# Altium PCB PCB1.PcbDoc
Units mil, origin at the board's own origin, x right, y up, seen from the top; angles counter-clockwise.
Board outline 538 x 411.54 mil, 2 copper layers (Top Layer, Bottom Layer); 24 components, 16 nets, 62 pads, 27 vias.
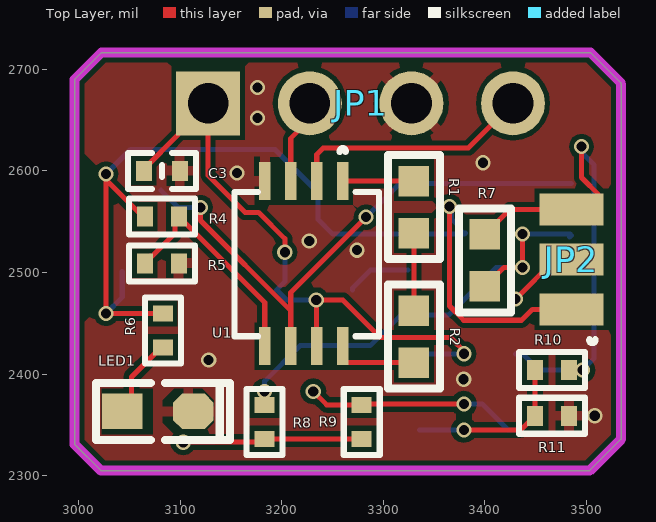
[diagram p0: Top Layer view]
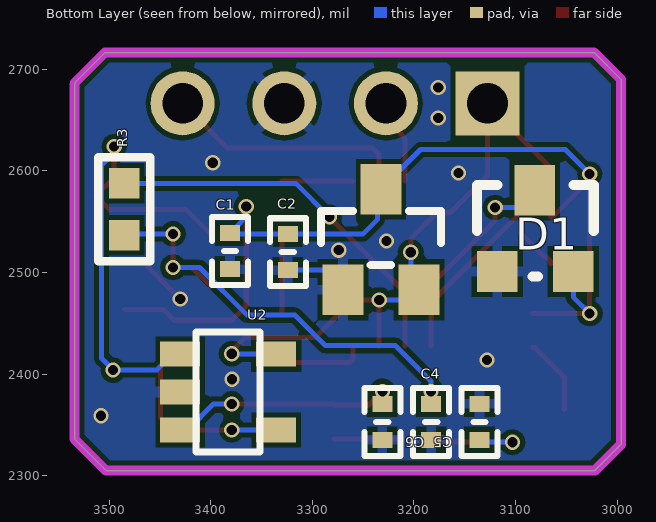
[diagram p1: Bottom Layer view, seen from below]
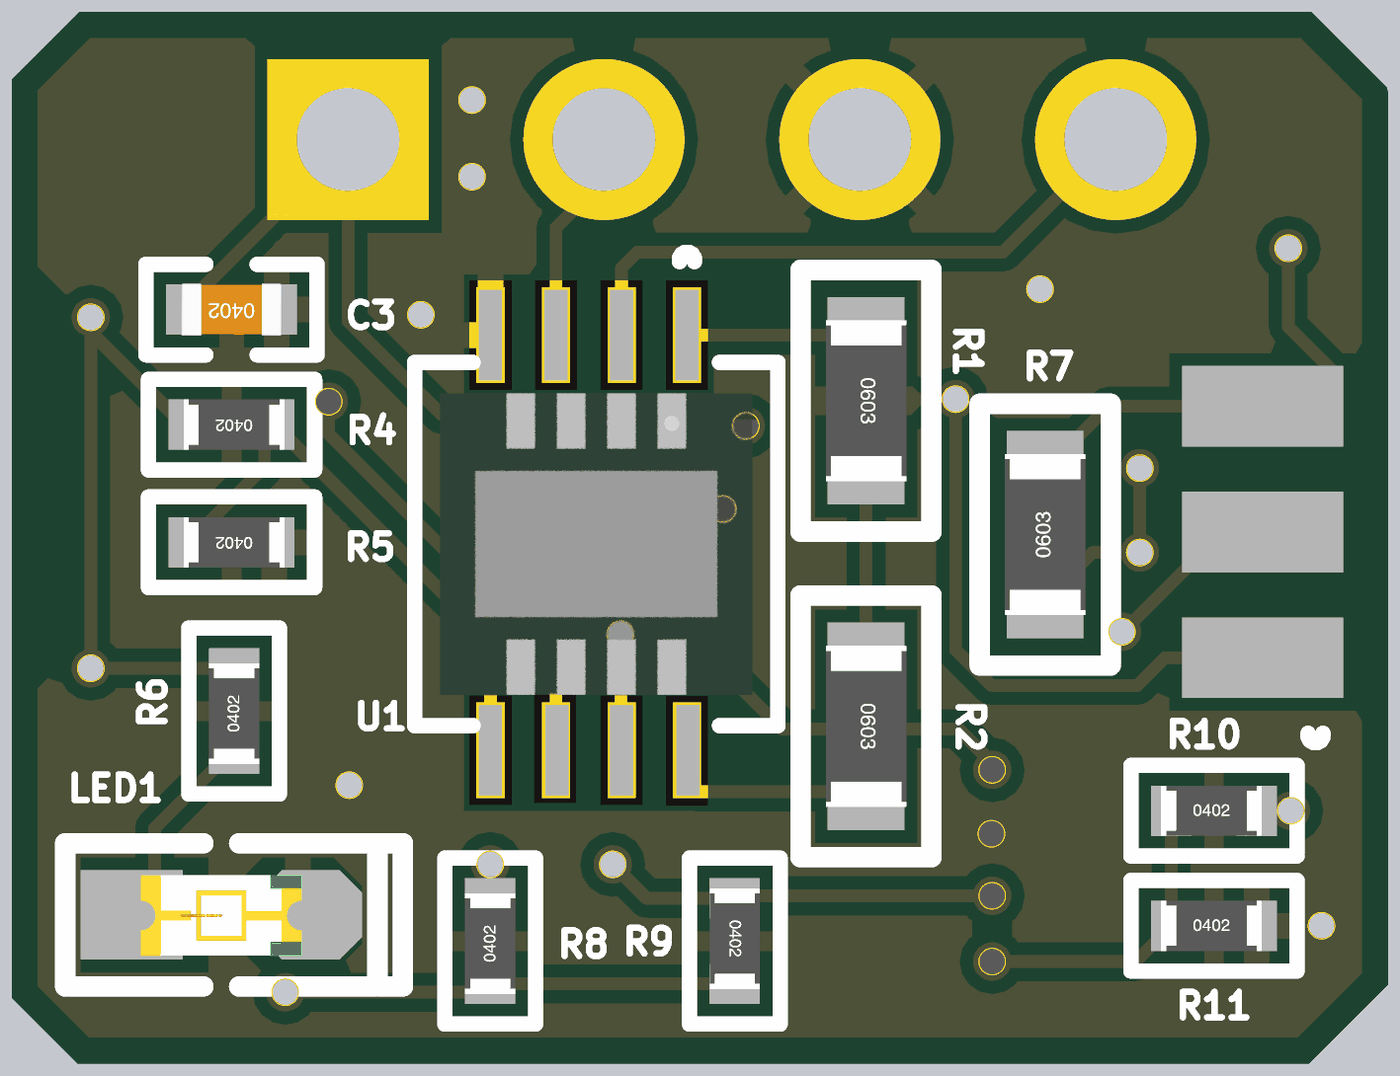
[diagram p2: 3D render of the assembled board from above, using the file's embedded part models]
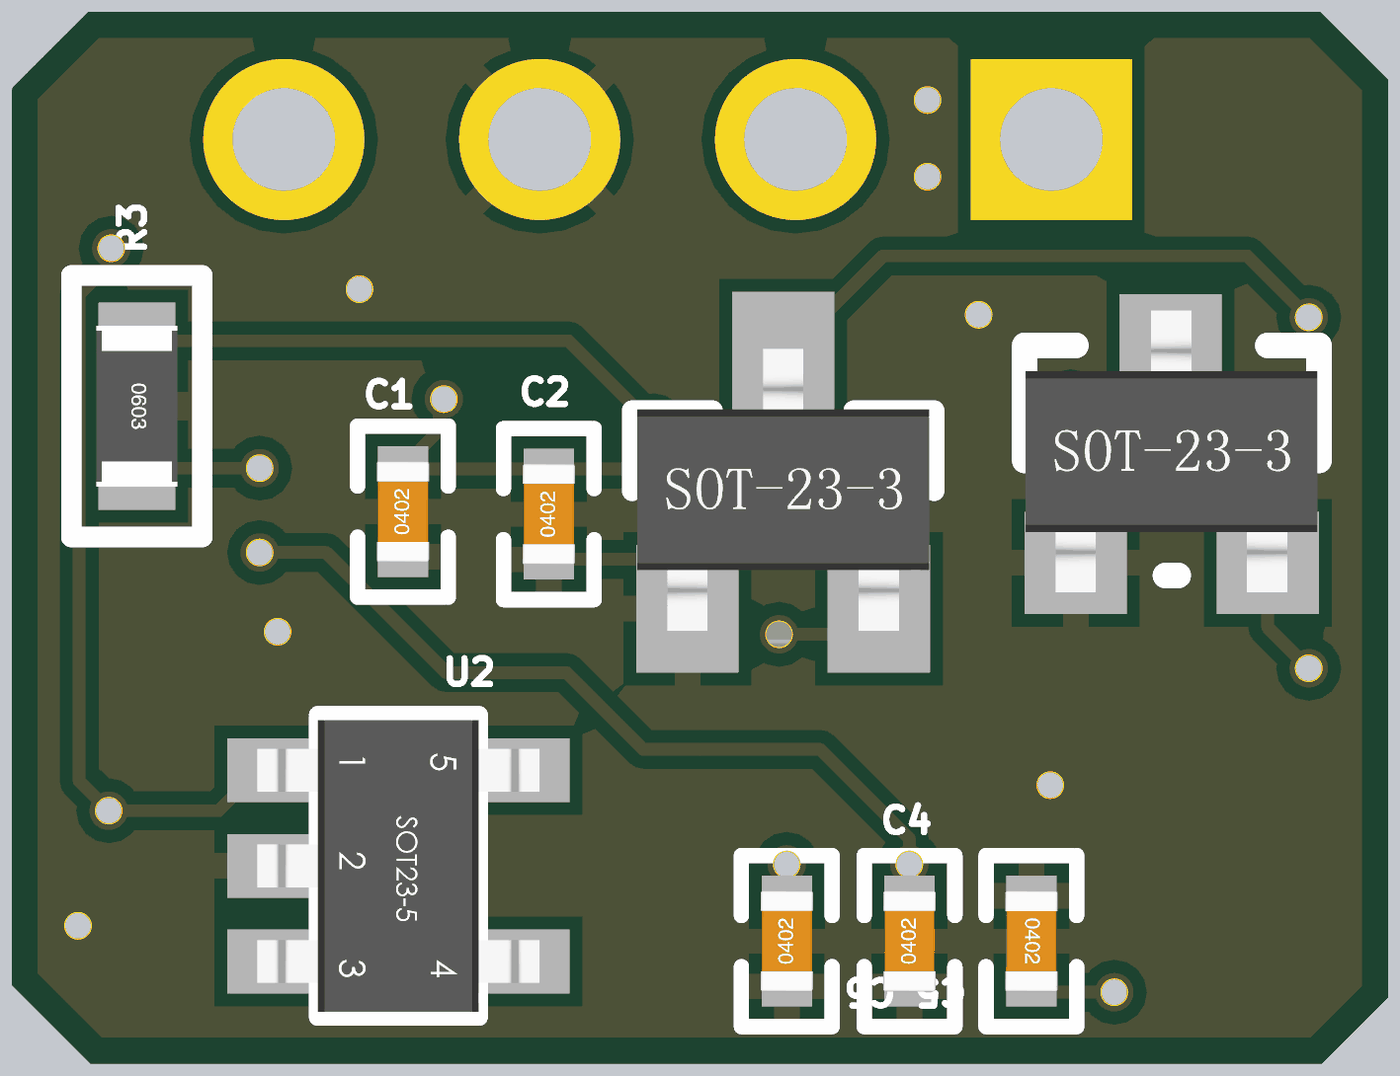
[diagram p3: 3D render of the assembled board from below, using the file's embedded part models]

## Layer stack, top to bottom
Top Solder: solder mask 0.4, Solder Resist, Dk 3.5
Top Layer: signal copper 1.4
Dielectric 1: dielectric 12.6, FR-4, Dk 4.8
Bottom Layer: signal copper 1.4
Bottom Solder: solder mask 0.4, Solder Resist, Dk 3.5

## Board outline
2996,2331 3022,2305 3503,2305 3534,2336 3534,2685 3533.46,2687.01 3503.94,2716.54 3022.54,2716.54 2996,2690

## Design rules (kind name [scope] priority, off if disabled: settings)
Clearance [All] p1: gap=5 ignorepadtopadclearanceinfootprint=FALSE
HoleToHoleClearance [All] p1: gap=5 allowstackedmicrovias=TRUE
MinimumSolderMaskSliver [All] p1: minsoldermaskwidth=3
PolygonConnect [All] p1: thpad.connectstyle=Relief thpad.reliefconductorwidth=10 thpad.reliefentries=4 thpad.polygonreliefangle="45 Angle" thpad.airgapwidth=5 smdpad.connectstyle=Relief smdpad.reliefconductorwidth=10 smdpad.reliefentries=4 smdpad.polygonreliefangle="90 Angle" smdpad.airgapwidth=5 via.connectstyle=Direct via.reliefconductorwidth=10 via.reliefentries=4 via.polygonreliefangle="45 Angle" via.airgapwidth=0
RoutingVias [All] p1: holewidth=10 width=50 viastyle="Through Hole" minholewidth=10 minwidth=5 maxholewidth=28 maxwidth=50
SilkToSilkClearance [All] p1: silktosilkclearance=5
SilkToSolderMaskClearance [IsPad] p1: minsilkscreentomaskgap=5 clearancetoexposedcopper=TRUE
SolderMaskExpansion [IsVia] p1: expansion=4 istentingtop=TRUE
Width [All] p1: maxlimit=10 minlimit=3 preferedwidth=5 minimp=50.000000 maximp=50.000000 favimp=50.000000
26 further rules are at their usual default settings.

## Components (designator, comment, footprint, x,y, rotation, side; value= is the part's Value field where it differs from the comment)
C1 "100nF" "C 0402_L" 3381,2521 r90 bottom
C2 "10nF" "C 0402_L" 3324,2520 r90 bottom
C3 "100nF" "C 0402_L" 3082,2600 r180 top
C4 "100pF" "C 0402_L" 3183,2353 r90 bottom
C5 "100nF" "C 0402_L" 3135.4,2353 r270 bottom
C6 "100nF" "C 0402_L" 3231,2353 r90 bottom
D1 "BAT54S-7-F" D-Schott-BAT54S-7-F 3122.88,2500.37 r180 bottom
JP1 "" JP-4 3277.56,2716.54 r0 top
JP2 "HDR-1X3" Lines-3P 3485.65,2513.54 r90 top
LED1 "White" "LED 0603W" 3078,2363 r0 top
R1 "4.7K" "R 0603_L" 3330,2564.33 r270 top
R2 "562R" "R 0603_L" 3330,2437 r270 top
R3 "0R" "R 0603_L" 3485,2562.21 r270 bottom
R4 "10K" "R 0402_L" 3083,2555 r180 top
R5 "10K" "R 0402_L" 3083,2509 r180 top
R6 "10K" "R 0402_L" 3083,2442 r90 top
R7 "0R" "R 0603_L" 3400,2512 r90 top
R8 "5.9K" "R 0402_L" 3183.1,2352.02 r90 top
R9 "5.9K" "R 0402_L" 3278.7,2353.98 r270 top
R10 "4.1K" "R 0402_L" 3465,2404 r0 top
R11 "10K" "R 0402_L" 3465,2359 r0 top
U1 "INA333AIDRGR" DRG8_2P4X1P45 3224.57,2508.31 r270 top
U2 "HTC8551" HTC8551 3382.76,2382.4 r270 bottom
? "SGM2021" V-Regulater-SGM2021 3232.4,2532.49 r180 bottom

## Footprints (in the part's own frame and the unit in brackets; to place one, negate y for a bottom-side part, rotate by r counter-clockwise, add the part's x,y. Pads: shape width x height; smd on the part's side, far side on the other; paste and mask are expansions set on the pad)
"C 0402_L" [mm] "无极性贴片电容         淘宝ID:黄晶宝石"
  rect 0.4x0.5 smd: 1(-0.45,0) 2(0.45,0)
  silkscreen extent -0.85,-0.45 0.85,0.45, body extent -0.5,-0.26 0.5,0.26, height 0.51
D-Schott-BAT54S-7-F [mil] "封装库来自淘宝卖家 ID：黄晶宝石"
  rect 40x40 smd: 1(4.88,0.63) 2(79.88,0.63)
  rect 40x50 smd: 3(41.88,80.63)
  silkscreen extent -15,-4 100,86, body extent -15,-11 99,99, height 47
DRG8_2P4X1P45 [mm]
  rect 0.95x0.28 smd paste-0.14: 1(-2.075,0.9) 2(-2.075,0.25) 3(-2.075,-0.4) 4(-2.075,-1.05) 5(2.05,-1.05) 6(2.05,-0.4) 7(2.05,0.25) 8(2.05,0.9)
  Top Layer region: 0,-1.2 0,-1.2 0,-1.2 0,-1.2 0,-1.2 0,-1.2 0,-1.2 0,-1.2
  Top Layer region: 0,1.2 0,1.2 0,1.2 0,1.2 0,1.2 0,1.2 0,1.2 0,1.2
  silkscreen extent -2.9,-1.8 1.8,1.8, body extent -1.5,-1.55 1.5,1.55, height 0.8
HTC8551 [mm]
  rect 0.635x1 smd: 1(-0.95,-1.2) 2(0,-1.2) 3(0.95,-1.2) 4(0.95,1.2) 5(-0.95,1.2)
  silkscreen extent -1.5,-0.8 1.5,0.8, body extent -1.45,-1.4 1.45,1.4, height 1.09
JP-4 [mm] "立式直插简牛插座，间距2.54 淘宝ID:黄晶宝石   店铺网址:https://shop463601444.taobao.com"
  rect 1.6x1.6 hole 1.02: 1(-3.81,-1.27)
  round 1.6 hole 1.02: 2(-1.27,-1.27) 3(1.27,-1.27) 4(3.81,-1.27)
"LED 0603W" [mil] "白色0603LED                                        淘宝ID:黄晶宝石"
  rect 40x35 smd: 1(-35,0.26)
  oct 40x35 smd: 2(35,0.26)
  silkscreen extent -61,-28 71,28, body extent -31,-16 32,16, height 18
Lines-3P [mm] "长：8.9mm，宽：4.2mm，高：3.4mm"
  rect 0.8x1.6 smd: 1(-1.264,0.017) 2(-0.014,0.017) 3(1.236,0.017)
  silkscreen extent -2.11,-0.58 -2.01,-0.43
"R 0402_L" [mm] "1/16W贴片电阻     淘宝ID:黄晶宝石"
  rect 0.4x0.5 smd: 1(-0.4,0) 2(0.45,0)
  silkscreen extent -0.8,-0.45 0.85,0.45, body extent -0.5,-0.25 0.5,0.25, height 0.3
"R 0603_L" [mil] "1/10W贴片电阻                 淘宝ID:黄晶宝石"
  rect 30x30 smd: 1(-25.59,0) 2(25.59,0)
  silkscreen extent -51,-26 51,26, body extent -31,-16 32,16, height 16
V-Regulater-SGM2021 [mil] "3x1.3x1mm(长宽高)    封装库来自淘宝卖家 ID：黄晶宝石"
  rect 40x50 smd: 1(-37.4,-49.49) 2(37.4,-49.49) 3(0,49.49)
  silkscreen extent -59,-25 59,28, body extent -57,-58 57,52, height 47

## Part data
C1 C2 C3 C4 C5 C6: library part C, "贴片电容", BOM名称=无极性贴片电容, 封装库来自淘宝卖家 ID：黄晶宝石=其他店铺购入均为盗版假冒封装库, 联系卖家，免费查找封装=唯一出售店铺网址https://shop463601444.taobao.com
D1: library part DIODE_SCHOTTKY_BAT54S
JP1: library part JP-4
JP2: library part "Header 3", "3P接插件，SM03B-GHS-TB", BOM名称=3P接插件, 优秀评价可免费更新封装库=联系淘宝ID：黄晶宝石，获取更新版封装库, 卖家免费技术支持，联系售后=唯一出售店铺网址https://shop463601444.taobao.com, 封装库来自淘宝卖家 ID：黄晶宝石=其他店铺购入均为假冒，请申请退款，本店现金奖励
LED1: library part LED-SMD, "贴片LED", BOM名称=贴片LED, 卖家免费查找封装，联系售后=唯一出售店铺网址https://shop463601444.taobao.com, 封装库来自淘宝卖家 ID：黄晶宝石=其他店铺购入均为假冒，请立即申请退款，本店奖励2~5元现金
R1 R2 R3 R7 R8 R9 R10 R11: library part R, "贴片电阻,20kohm,±1%,1/10W,0603,SMD", BOM名称=贴片电阻, 封装库来自淘宝卖家 ID：黄晶宝石=其他店铺购入均为盗版假冒封装库, 联系卖家，免费查找封装=唯一出售店铺网址https://shop463601444.taobao.com
R4 R5 R6: library part R, "贴片电阻", BOM名称=贴片电阻, 封装库来自淘宝卖家 ID：黄晶宝石=其他店铺购入均为盗版假冒封装库, 联系卖家，免费查找封装=唯一出售店铺网址https://shop463601444.taobao.com
U1: "Low Power, Precision Instrumentation Amplifier", Manufacturer="Texas Instruments", PACKAGE_DESIGNATOR=DRG, Copyright="Copyright (C) 2021 Accelerated Designs. All rights reserved", Datasheet_URL=http://www.ti.com/lit/gpn/INA333, FAMILY_NAME="SINGLE SUPPLY", GENERIC_PART_NUMBER=INA333, INDUSTRY_STD_PKG_TYPE=SON, Manufacturer_Part_Number=INA333AIDRGR, PIN_COUNT=8, RefDes=RefDes, Type=DEV, Vendor="Texas Instruments"

## Via types
v1: diameter 15/15 (per signal layer), hole 10, Top Layer to Bottom Layer, tented both sides, 27 vias

## Nets (pads, with @x,y where several pads share a name; then routed paths per layer and width w, separated by ;. In a path a pad name is that pad's centre, name@x,y a point inside that pad or via, vN(x,y) a via of type N, cw(c..) or ccw(c..) an arc to the next point about the centre after c; other vN are vias at no path point)
5V: ?.3 C1.2 C2.2 D1.2 JP2.1 R4.2 R6.2 | length 972
  Top Layer w5: v1(3027,2597) v1@3027,2591.28 ; R4.2 3064.28,2554 v1@3027,2591.28 ; R6.2 v1(3027,2459.71) v1@3027,2591.28 ; v1(3365,2565) 3365,2467 3379,2453 3436,2453 3446.79,2463.79 JP2.1
  Bottom Layer w5: v1(3027,2459.71) 3043,2475.71 D1.2 ; v1(3027,2597) 3051,2621 3193.37,2621 3235.6,2578.77 3235.6,2552.4 3250.29,2537.71 C2.2 3380,2537.71 C1.2 3379.03,2538.71 3373.65,2544.09 3373.65,2546.06 3366.91,2552.8 3366.91,2563.09 v1(3365,2565)
Before_FTR: C4.2 R3.2 R7.1 R8.2 | length 442.3
  Top Layer w5: R7.1 3418.6,2505 3435,2505 3437,2507 v1(3437,2538) v1@3436,2537 ; v1@3436,2500 v1@3436,2505
  Bottom Layer w5: v1(3183.11,2383) 3183.11,2393.11 3218,2428 3287,2428 3317,2458 3364.04,2458 3411.04,2505 v1@3435,2505 ; v1(3437,2538) 3483.63,2538 R3.2 ; R3.2@3483.26,2534.88 R3.2
  other v1: 3437,2505
DET_F: JP2.3 R7.2 R10.2 U2.1 | length 487.2
  Top Layer w5: R7.2 3424.63,2562.21 JP2.3 3499.75,2562.21 3513,2575.46 3495,2593.46 v1(3495,2624)
  Bottom Layer w5: U2.1 3437.19,2419.8 3452.99,2404 v1(3496,2404) 3507.5,2415.5 3507.5,2605.91 3495,2618.42 v1(3495,2624)
GND: ?.1 C1.1 C2.1 C3.1 C4.1 C5.1 C6.1 D1.1 JP1.3 JP2.2 LED1.2 R5.1 R11.2 U1.4 U2.2 | length 134.4
  Top Layer w5: v1(3430,2474) 3430.25,2474 3469.25,2513 JP2.2
  Bottom Layer w5: ?.1 3269.8,2484.78 3287.3,2502.28 C2.1
  other v1: 3508,2359 3379,2395 3128,2414 3274,2522 3227,2531 3156,2598 3398,2608 3176,2652 3176,2682
NetC5_2: C5.2 R8.1 R9.2 | length 210.4
  Top Layer w5: v1(3103,2333) 3179.84,2333 R8.1 R9.2
  Bottom Layer w5: v1(3103,2333) 3133.12,2333 C5.2
NetC6_2: C6.2 R9.1 U2.3 | length 215.6
  Top Layer w5: v1(3231,2383) 3244.26,2369.73 R9.1 3279.68,2370.71 v1(3379.29,2370.71)
  Bottom Layer w5: v1(3379.29,2370.71) 3397.1,2370.71 3422.81,2345 U2.3
NetD1_3: D1.3 R3.1 U1.6 | length 557.8
  Top Layer w5: v1(3120,2564) 3120,2551.29 3208.82,2462.47 ; U1.6 3208.82,2462.47 ; v1(3283,2554.52) 3208.82,2480.34 3208.82,2462.47
  Bottom Layer w5: D1.3 3098,2564 v1(3120,2564) ; v1(3283,2554.52) 3316.28,2587.81 R3.1
NetLED1_1: LED1.1 R6.1 | length 75
  Top Layer w5: LED1.1@3052,2365.26 3052,2397.22 3081.03,2426.25 R6.1
NetR1_1: R1.1 U1.1 | length 70
  Top Layer w5: U1.1 3329.92,2590 R1.1
NetR1_2: R1.2 R2.1 | length 76.2
  Top Layer w5: R2.1 R1.2
NetR2_2: R2.2 U1.8 | length 84.4
  Top Layer w5: U1.8 3260,2414.42 3263.01,2411.41 R2.2
NetR4_1: R4.1 R5.2 U1.5 | length 223.4
  Top Layer w5: R5.2 3065.29,2510.97 3070.66,2516.35 3072.63,2516.35 3094.9,2538.62 3094.9,2551.16 R4.1 3105.11,2548.64 3183.23,2470.53 U1.5
NetR10_1: R10.1 R11.1 U2.4 | length 165.7
  Top Layer w5: v1(3379.29,2345) 3435.25,2345 3441.91,2351.65 3443.87,2351.65 3449.25,2357.03 R11.1 R10.1
  Bottom Layer w5: U2.4 v1(3379.29,2345)
S+: JP1.2 U1.3 | length 84.3
  Top Layer w5: U1.3 3208.82,2632.1 3227.56,2650.84 JP1.2
S-: JP1.4 U1.2 | length 240.2
  Top Layer w5: U1.2 3234.41,2616.2 3240.75,2622.54 3383.56,2622.54 JP1.4
Stable_5V: ?.2 C3.2 JP1.1 U1.7 U2.5 | length 623.8
  Top Layer w5: C3.2 3064.29,2601.97 3098.56,2636.25 3098.56,2637.54 JP1.1 3127.56,2595.44 3164,2559 3177.21,2559 3203,2533.21 v1(3203,2520) ; U1.7 3234.2,2427.8 3234.2,2472.8 v1(3234,2473) 3260,2473 3297,2436 3366,2436 v1@3382,2420
  Bottom Layer w5: v1(3203,2520) 3203,2491 ?.2 3205,2473 v1(3234,2473) ; U2.5 3335.71,2420 v1@3382,2420
  other v1: 3379.29,2420

## Polygon pours and split planes (outlines as drawn)
GND on Bottom Layer "Top Layer-No Net1" (solid, pour order 18): 2996,2331 3022,2305 3503,2305 3534,2336 3534,2685 3533.46,2687.01 3503.94,2716.54 3022.54,2716.54 2996,2690
GND on Top Layer "Top Layer-No Net" (solid, remove dead copper, pour order 17): 2996,2331 3022,2305 3503,2305 3534,2336 3534,2685 3533.46,2687.01 3503.94,2716.54 3022.54,2716.54 2996,2690

## Keep-outs
Keep-Out Layer:
  lines w10: 3533.46,2687.01 3503.94,2716.54 3022.54,2716.54 2996,2690 2996,2331 3022,2305 3503,2305 3534,2336 3534,2685

## Other copper
Top Layer:
  pour cut-out: 3006,2617 3016.99,2606.01 3017.99,2606.01 3017.99,2463.45 3006,2451.46

## Dimensions
3503.94,2716.54 to 3503,2305 on Mechanical 15
2996,2331 to 3534,2336 on Mechanical 15

## Text inside footprints (layer, text, board x,y; h text height)
U1: Mechanical 7 "Alt 2 Padstyle: OX90Y60D30P" at 2638.54,2845.81 h50 r270; Mechanical 7 "Alt 1 Padstyle: OX60Y90D30P" at 2713.54,2845.81 h50 r270; Mechanical 7 "Default Padstyle: RX37p4Y11p02D0T" at 2788.54,2920.81 h50 r270